# Altium PCB BMS-P00-V00.PcbDoc
Units mil, origin at the board's own origin, x right, y up, seen from the top; angles counter-clockwise.
Board outline 6000 x 4000 mil, 2 copper layers (Top Layer, Bottom Layer); 218 components, 128 nets, 564 pads, 0 vias.
Unrouted connection lines stored in the file: 387.
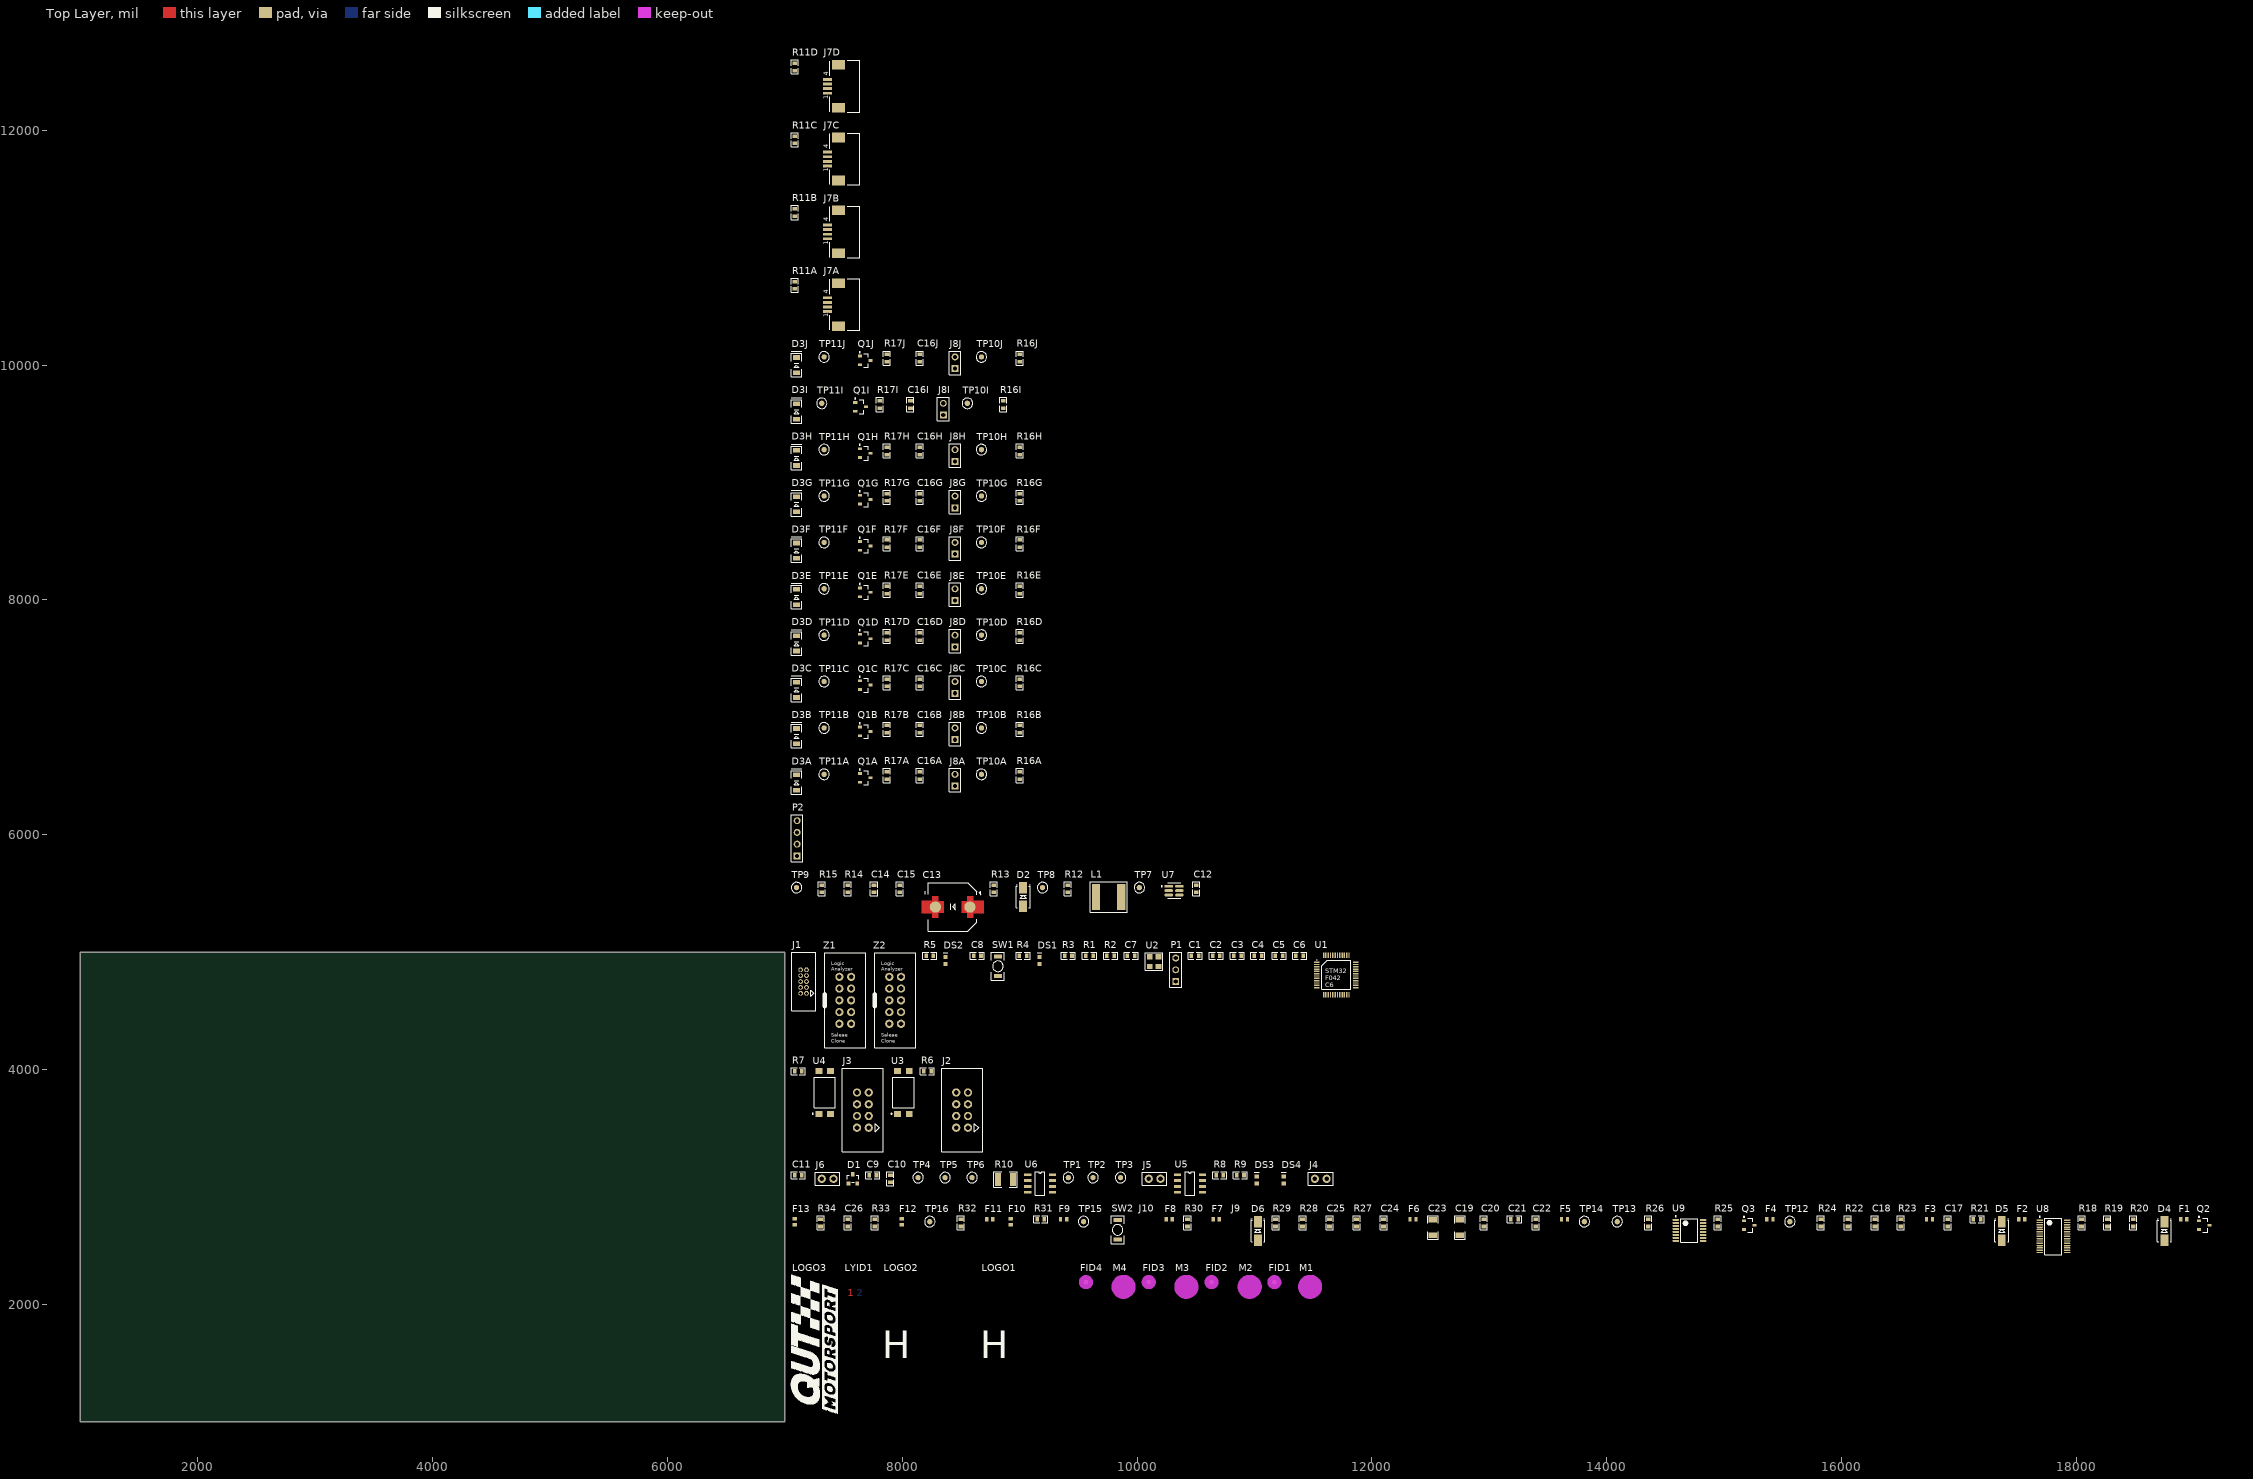
[diagram p0: Top Layer view]
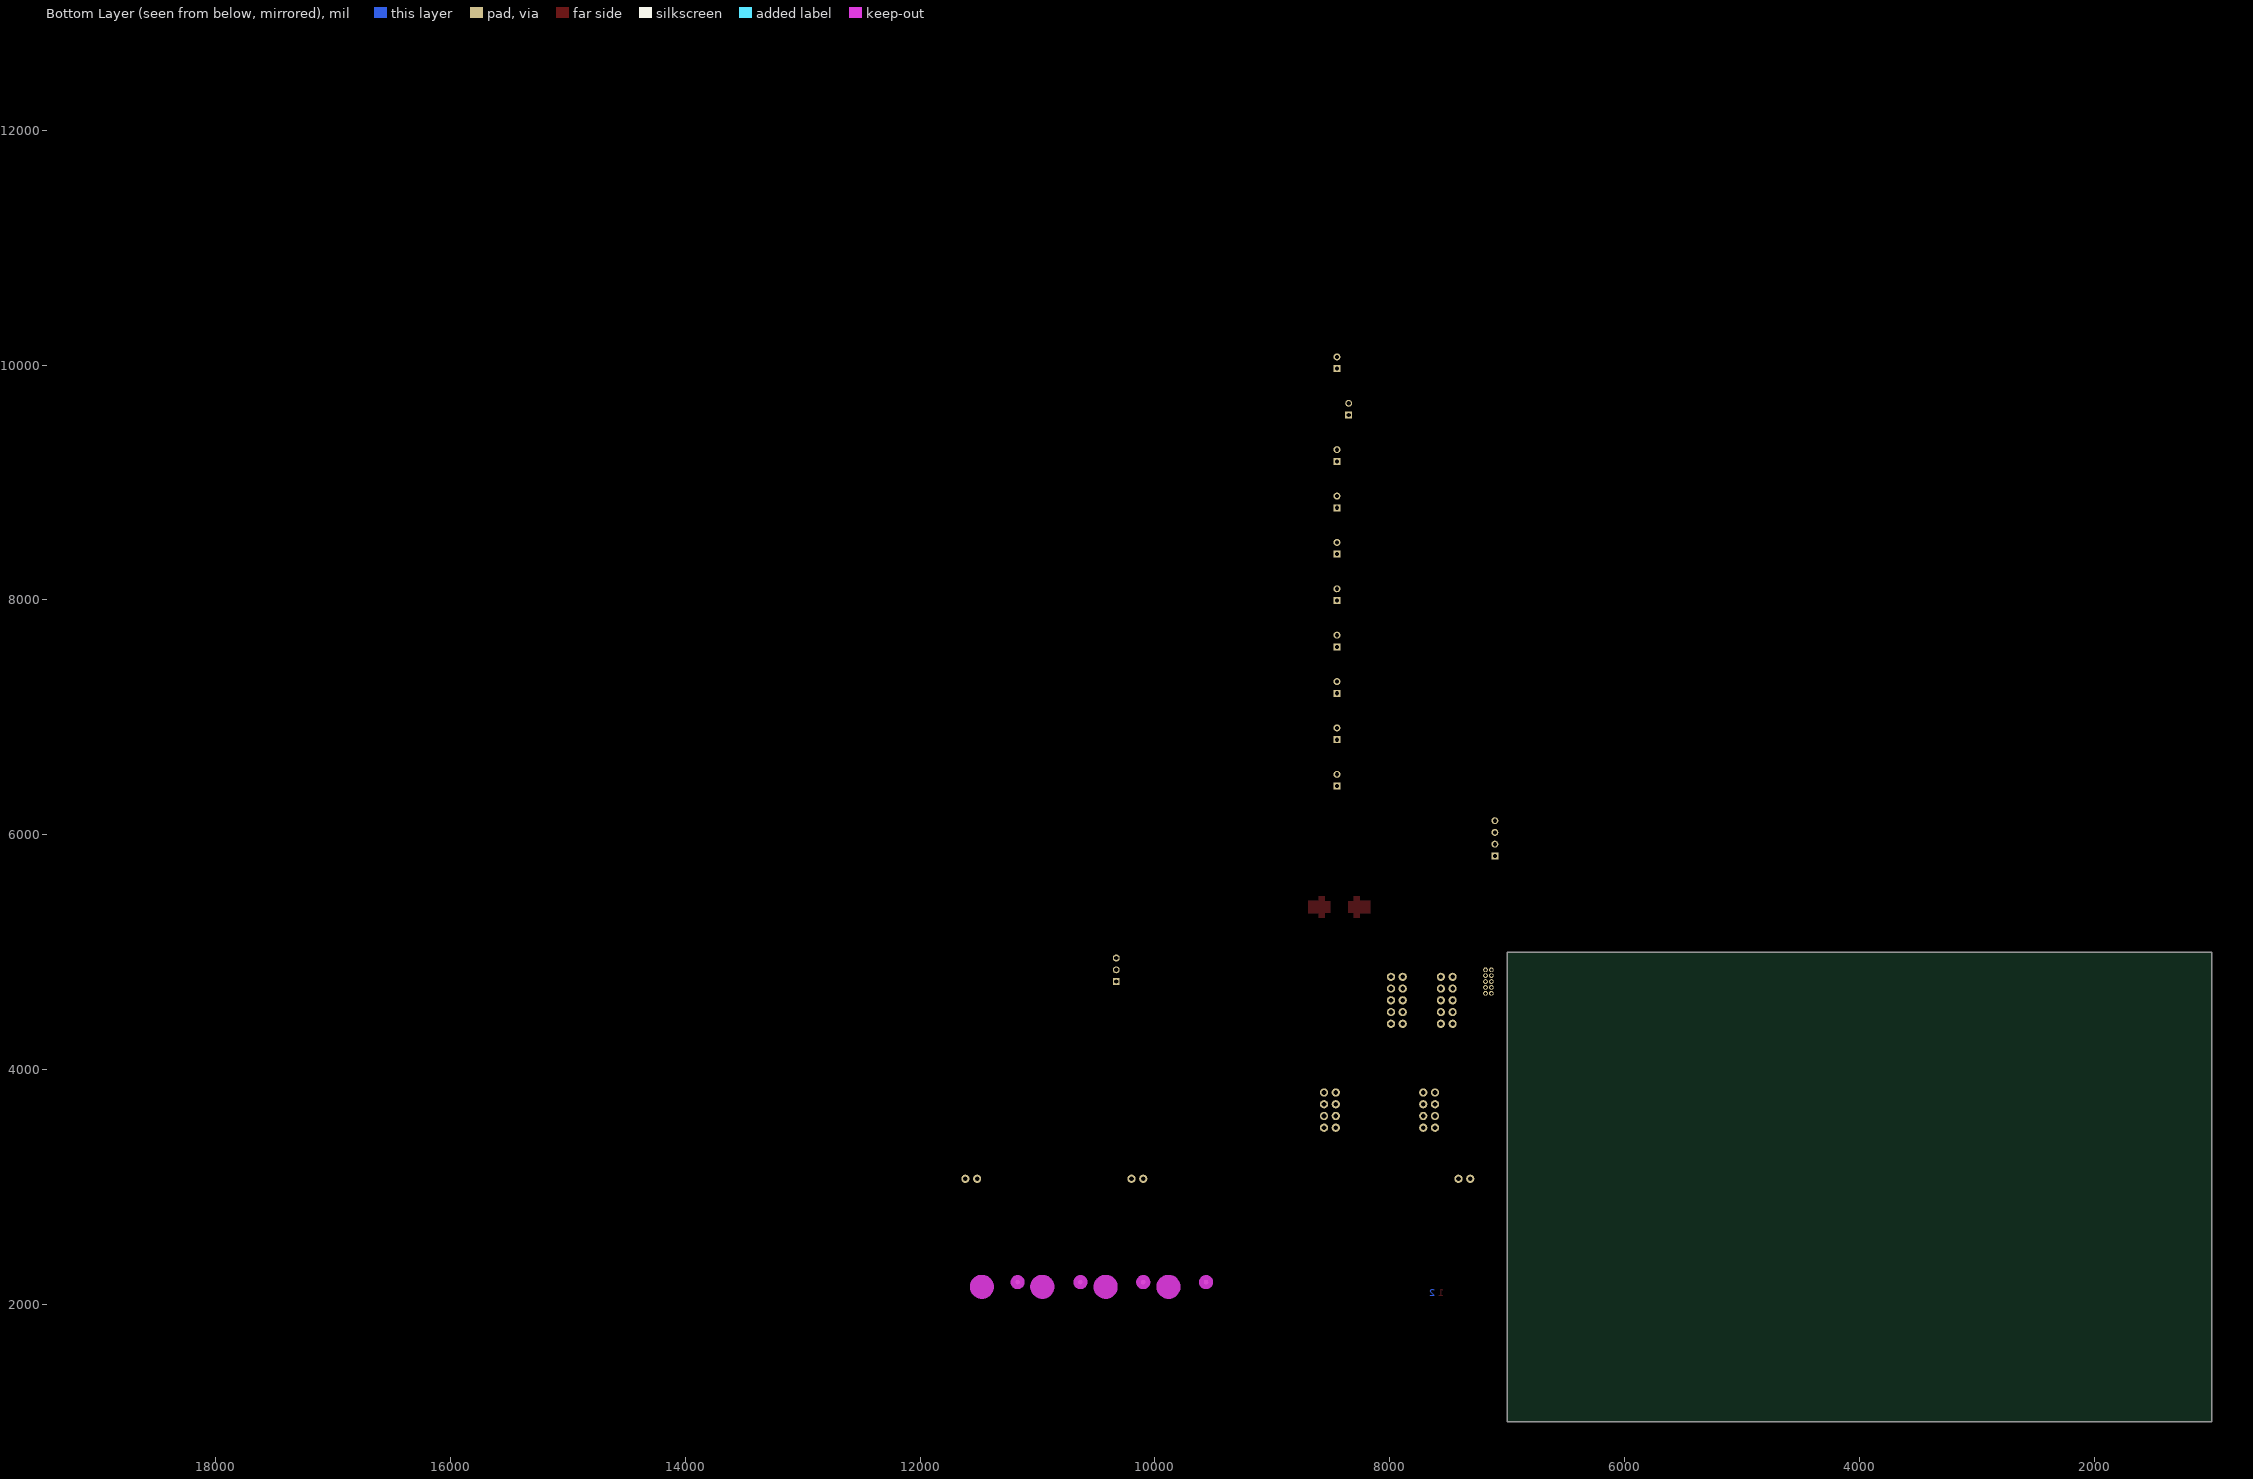
[diagram p1: Bottom Layer view, seen from below]

## Layer stack, top to bottom
Top Solder: solder mask 0.4, Solder Resist, Dk 3.5
Top Layer: signal copper 1.4
Dielectric 1: dielectric 12.6, FR-4, Dk 4.8
Bottom Layer: signal copper 1.4
Bottom Solder: solder mask 0.4, Solder Resist, Dk 3.5

## Board outline
1000,1000 7000,1000 7000,5000 1000,5000

## Design rules (kind name [scope] priority, off if disabled: settings)
Clearance [All] p1: gap=10 ignorepadtopadclearanceinfootprint=FALSE except(0: Arc-Hole Track-Hole SMDPad-Hole THPad-Hole Via-Hole Fill-Hole Poly-Hole Region-Hole Text-Hole)
PolygonConnect [All] p1: connectstyle=Relief reliefconductorwidth=10 reliefentries=4 polygonreliefangle="90 Angle" airgapwidth=10
RoomDefinition "Temperature Sensor Interface" [InComponentClass('Temperature Sensor Interface')] p1: confinementstyle=ConfineIn formatcopy=TRUE lockcomponents=FALSE outline 7045,5760 7180,5760 7180,6280 7045,6280
RoomDefinition PSU [InComponentClass('PSU')] p2: confinementstyle=ConfineIn formatcopy=TRUE lockcomponents=FALSE outline 7045,5160 10650,5160 10650,5710 7045,5710
RoomDefinition Microcontroller [InComponentClass('Microcontroller')] p3: confinementstyle=ConfineIn formatcopy=TRUE lockcomponents=FALSE outline 7045,4175 11900,4175 11900,5110 7045,5110
RoomDefinition Isolation [InComponentClass('Isolation')] p4: confinementstyle=ConfineIn formatcopy=TRUE lockcomponents=FALSE outline 7045,3290 8695,3290 8695,4125 7045,4125
RoomDefinition "Isolated CAN" [InComponentClass('Isolated CAN')] p5: confinementstyle=ConfineIn formatcopy=TRUE lockcomponents=FALSE outline 7045,2915 11680,2915 11680,3240 7045,3240
RoomDefinition FlexPCBTempSensors4 [InComponentClass('FlexPCBTempSensors4')] p6: confinementstyle=ConfineIn formatcopy=TRUE lockcomponents=FALSE outline 7045,12140 7650,12140 7650,12710 7045,12710
RoomDefinition FlexPCBTempSensors3 [InComponentClass('FlexPCBTempSensors3')] p7: confinementstyle=ConfineIn formatcopy=TRUE lockcomponents=FALSE outline 7045,11520 7650,11520 7650,12090 7045,12090
RoomDefinition FlexPCBTempSensors2 [InComponentClass('FlexPCBTempSensors2')] p8: confinementstyle=ConfineIn formatcopy=TRUE lockcomponents=FALSE outline 7045,10900 7650,10900 7650,11470 7045,11470
RoomDefinition FlexPCBTempSensors1 [InComponentClass('FlexPCBTempSensors1')] p9: confinementstyle=ConfineIn formatcopy=TRUE lockcomponents=FALSE outline 7045,10280 7650,10280 7650,10850 7045,10850
RoomDefinition "Cell Monitor" [InComponentClass('Cell Monitor')] p10: confinementstyle=ConfineIn formatcopy=TRUE lockcomponents=FALSE outline 7045,2405 19170,2405 19170,2865 7045,2865
RoomDefinition "CELL 10 INTERFACE" [InComponentClass('CELL 10 INTERFACE')] p11: confinementstyle=ConfineIn formatcopy=TRUE lockcomponents=FALSE outline 7045,9890 9205,9890 9205,10230 7045,10230
RoomDefinition "CELL 9 INTERFACE" [InComponentClass('CELL 9 INTERFACE')] p12: confinementstyle=ConfineIn formatcopy=TRUE lockcomponents=FALSE outline 7045,9495 9045,9495 9045,9835 7045,9835
RoomDefinition "CELL 8 INTERFACE" [InComponentClass('CELL 8 INTERFACE')] p13: confinementstyle=ConfineIn formatcopy=TRUE lockcomponents=FALSE outline 7045,9100 9205,9100 9205,9440 7045,9440
RoomDefinition "CELL 7 INTERFACE" [InComponentClass('CELL 7 INTERFACE')] p14: confinementstyle=ConfineIn formatcopy=TRUE lockcomponents=FALSE outline 7045,8705 9205,8705 9205,9045 7045,9045
RoomDefinition "CELL 6 INTERFACE" [InComponentClass('CELL 6 INTERFACE')] p15: confinementstyle=ConfineIn formatcopy=TRUE lockcomponents=FALSE outline 7045,8310 9205,8310 9205,8650 7045,8650
RoomDefinition "CELL 5 INTERFACE" [InComponentClass('CELL 5 INTERFACE')] p16: confinementstyle=ConfineIn formatcopy=TRUE lockcomponents=FALSE outline 7045,7915 9205,7915 9205,8255 7045,8255
RoomDefinition "CELL 4 INTERFACE" [InComponentClass('CELL 4 INTERFACE')] p17: confinementstyle=ConfineIn formatcopy=TRUE lockcomponents=FALSE outline 7045,7520 9205,7520 9205,7860 7045,7860
RoomDefinition "CELL 3 INTERFACE" [InComponentClass('CELL 3 INTERFACE')] p18: confinementstyle=ConfineIn formatcopy=TRUE lockcomponents=FALSE outline 7045,7125 9205,7125 9205,7465 7045,7465
RoomDefinition "CELL 2 INTERFACE" [InComponentClass('CELL 2 INTERFACE')] p19: confinementstyle=ConfineIn formatcopy=TRUE lockcomponents=FALSE outline 7045,6730 9205,6730 9205,7070 7045,7070
RoomDefinition "CELL 1 INTERFACE" [InComponentClass('CELL 1 INTERFACE')] p20: confinementstyle=ConfineIn formatcopy=TRUE lockcomponents=FALSE outline 7045,6335 9205,6335 9205,6675 7045,6675
RoomDefinition BMS-S01-V00-BatteryManagementSystem [InComponentClass('BMS-S01-V00-BatteryManagementSystem')] p21: confinementstyle=ConfineIn formatcopy=TRUE lockcomponents=FALSE outline 7045,1060 11585,1060 11585,2360 7045,2360
RoutingVias [All] p1: holewidth=28 width=50 viastyle="Through Hole" minholewidth=28 minwidth=50 maxholewidth=28 maxwidth=50
SolderMaskExpansion [All] p1: expansion=4 istentingtop=FALSE
Width "Schematic Width Constraint_24" [InNet('CV7')] p1: maxlimit=30 minlimit=15 preferedwidth=20 minimp=50.000000 maximp=50.000000 favimp=50.000000
Width "Schematic Width Constraint_23" [InNet('CVF3')] p2: maxlimit=30 minlimit=15 preferedwidth=20 minimp=50.000000 maximp=50.000000 favimp=50.000000
Width "Schematic Width Constraint_22" [InNet('C0')] p3: maxlimit=30 minlimit=15 preferedwidth=20 minimp=50.000000 maximp=50.000000 favimp=50.000000
Width "Schematic Width Constraint_21" [InNet('CV3')] p4: maxlimit=30 minlimit=15 preferedwidth=20 minimp=50.000000 maximp=50.000000 favimp=50.000000
Width "Schematic Width Constraint_20" [InNet('CV10')] p5: maxlimit=30 minlimit=15 preferedwidth=20 minimp=50.000000 maximp=50.000000 favimp=50.000000
Width "Schematic Width Constraint_19" [InNet('CV5')] p6: maxlimit=30 minlimit=15 preferedwidth=20 minimp=50.000000 maximp=50.000000 favimp=50.000000
Width "Schematic Width Constraint_18" [InNet('CV9')] p7: maxlimit=30 minlimit=15 preferedwidth=20 minimp=50.000000 maximp=50.000000 favimp=50.000000
Width "Schematic Width Constraint_17" [InNet('CV2')] p8: maxlimit=30 minlimit=15 preferedwidth=20 minimp=50.000000 maximp=50.000000 favimp=50.000000
Width "Schematic Width Constraint_16" [InNet('NetF1_2')] p9: maxlimit=30 minlimit=15 preferedwidth=20 minimp=50.000000 maximp=50.000000 favimp=50.000000
Width "Schematic Width Constraint_15" [InNet('CVF9')] p10: maxlimit=30 minlimit=15 preferedwidth=20 minimp=50.000000 maximp=50.000000 favimp=50.000000
Width "Schematic Width Constraint_14" [InNet('CVF5')] p11: maxlimit=30 minlimit=15 preferedwidth=20 minimp=50.000000 maximp=50.000000 favimp=50.000000
Width "Schematic Width Constraint_13" [InNet('C10')] p12: maxlimit=30 minlimit=15 preferedwidth=20 minimp=50.000000 maximp=50.000000 favimp=50.000000
Width "Schematic Width Constraint_12" [InNet('CVF0')] p13: maxlimit=30 minlimit=15 preferedwidth=20 minimp=50.000000 maximp=50.000000 favimp=50.000000
Width "Schematic Width Constraint_11" [InNet('CVF7')] p14: maxlimit=30 minlimit=15 preferedwidth=20 minimp=50.000000 maximp=50.000000 favimp=50.000000
Width "Schematic Width Constraint_10" [InNet('CV0')] p15: maxlimit=30 minlimit=15 preferedwidth=20 minimp=50.000000 maximp=50.000000 favimp=50.000000
Width "Schematic Width Constraint_9" [InNet('CV4')] p16: maxlimit=30 minlimit=15 preferedwidth=20 minimp=50.000000 maximp=50.000000 favimp=50.000000
Width "Schematic Width Constraint_8" [InNet('CVF1')] p17: maxlimit=30 minlimit=15 preferedwidth=20 minimp=50.000000 maximp=50.000000 favimp=50.000000
Width "Schematic Width Constraint_7" [InNet('CV8')] p18: maxlimit=30 minlimit=15 preferedwidth=20 minimp=50.000000 maximp=50.000000 favimp=50.000000
Width "Schematic Width Constraint_6" [InNet('CVF2')] p19: maxlimit=30 minlimit=15 preferedwidth=20 minimp=50.000000 maximp=50.000000 favimp=50.000000
Width "Schematic Width Constraint_5" [InNet('CVF6')] p20: maxlimit=30 minlimit=15 preferedwidth=20 minimp=50.000000 maximp=50.000000 favimp=50.000000
Width "Schematic Width Constraint_4" [InNet('CVF10')] p21: maxlimit=30 minlimit=15 preferedwidth=20 minimp=50.000000 maximp=50.000000 favimp=50.000000
Width "Schematic Width Constraint_3" [InNet('CVF4')] p22: maxlimit=30 minlimit=15 preferedwidth=20 minimp=50.000000 maximp=50.000000 favimp=50.000000
Width "Schematic Width Constraint_2" [InNet('CV1')] p23: maxlimit=30 minlimit=15 preferedwidth=20 minimp=50.000000 maximp=50.000000 favimp=50.000000
Width "Schematic Width Constraint_1" [InNet('CVF8')] p24: maxlimit=30 minlimit=15 preferedwidth=20 minimp=50.000000 maximp=50.000000 favimp=50.000000
Width "Schematic Width Constraint" [InNet('CV6')] p25: maxlimit=30 minlimit=15 preferedwidth=20 minimp=50.000000 maximp=50.000000 favimp=50.000000
Width [All] p26: maxlimit=10 minlimit=10 preferedwidth=10
30 further rules are at their usual default settings.

## Classes and differential pairs
channel class BMS-S09-V00-TemperatureSensors: FlexPCBTempSensors1 FlexPCBTempSensors2 FlexPCBTempSensors3 FlexPCBTempSensors4
channel class BMS-S03-V00-CellInterface: "CELL 1 INTERFACE" "CELL 2 INTERFACE" "CELL 3 INTERFACE" "CELL 4 INTERFACE" "CELL 5 INTERFACE" "CELL 6 INTERFACE" "CELL 7 INTERFACE" "CELL 8 INTERFACE" "CELL 9 INTERFACE" "CELL 10 INTERFACE"
net class TEMP[1..4]: TEMP1 TEMP2 TEMP3 TEMP4
component class "Temperature Sensor Interface": P2
component class PSU: C12 C13 C14 C15 D2 L1 R12 R13 R14 R15 TP7 TP8 TP9 U7
component class Microcontroller: C1 C2 C3 C4 C5 C6 C7 C8 DS1 DS2 J1 P1 R1 R2 R3 R4 R5 SW1 U1 U2 Z1 Z2
component class Isolation: J2 J3 R6 R7 U3 U4
component class "Isolated CAN": C9 C10 C11 D1 DS3 DS4 J4 J5 J6 R8 R9 R10 TP1 TP2 TP3 TP4 TP5 TP6 U5 U6
component class FlexPCBTempSensors4: J7D R11D
component class FlexPCBTempSensors3: J7C R11C
component class FlexPCBTempSensors2: J7B R11B
component class FlexPCBTempSensors1: J7A R11A
component class "Cell Monitor": C17 C18 C19 C20 C21 C22 C23 C24 C25 C26 D4 D5 D6 F1 F2 F3 F4 F5 F6 F7 F8 F9 F10 F11 F12 F13 J9 J10 Q2 Q3 R18 R19 R20 R21 R22 R23 R24 R25 R26 R27 R28 R29 R30 R31 R32 R33 R34 SW2 TP12 TP13 TP14 TP15 TP16 U8 U9
component class "CELL 10 INTERFACE": C16J D3J J8J Q1J R16J R17J TP10J TP11J
component class "CELL 9 INTERFACE": C16I D3I J8I Q1I R16I R17I TP10I TP11I
component class "CELL 8 INTERFACE": C16H D3H J8H Q1H R16H R17H TP10H TP11H
component class "CELL 7 INTERFACE": C16G D3G J8G Q1G R16G R17G TP10G TP11G
component class "CELL 6 INTERFACE": C16F D3F J8F Q1F R16F R17F TP10F TP11F
component class "CELL 5 INTERFACE": C16E D3E J8E Q1E R16E R17E TP10E TP11E
component class "CELL 4 INTERFACE": C16D D3D J8D Q1D R16D R17D TP10D TP11D
component class "CELL 3 INTERFACE": C16C D3C J8C Q1C R16C R17C TP10C TP11C
component class "CELL 2 INTERFACE": C16B D3B J8B Q1B R16B R17B TP10B TP11B
component class "CELL 1 INTERFACE": C16A D3A J8A Q1A R16A R17A TP10A TP11A
component class BMS-S01-V00-BatteryManagementSystem: FID1 FID2 FID3 FID4 LOGO1 LOGO2 LOGO3 LYID1 M1 M2 M3 M4

## Components (designator, comment, footprint, x,y, rotation, side; value= is the part's Value field where it differs from the comment)
C1 "100nF" Cap_Ceramic_0603 10495,4970 r0 top
C2 "4u7" Cap_Ceramic_0603 10675,4970 r0 top
C3 "100nF" Cap_Ceramic_0603 10855,4970 r0 top
C4 "4u7" Cap_Ceramic_0603 11030,4970 r0 top
C5 "100nF" Cap_Ceramic_0603 11210,4970 r0 top
C6 "4u7" Cap_Ceramic_0603 11385,4970 r0 top
C7 "100nF" Cap_Ceramic_0603 9950,4970 r0 top
C8 "100nF" Cap_Ceramic_0603 8640,4970 r0 top
C9 "100nF" Cap_Ceramic_0603 7750,3100 r0 top
C10 "100nF" Cap_Ceramic_0603 7900,3070 r90 top
C11 "100nF" Cap_Ceramic_0603 7115,3100 r0 top
C12 "100nF 100V" Cap_Ceramic_0603 10505,5540 r90 top
C13 "47uF 80V 10% AluPoly 10x10mm" CAP_ALU_10x10mm 8430,5385 r0 top
C14 "47uF 16V 1210" Cap_Ceramic_0603 7760,5540 r90 top
C15 "47uF 16V 1210" Cap_Ceramic_0603 7980,5540 r90 top
C16A "220nF" Cap_Ceramic_0603 8150,6505 r90 top (schematic designator C16)
C16B "220nF" Cap_Ceramic_0603 8150,6900 r90 top (schematic designator C16)
C16C "220nF" Cap_Ceramic_0603 8150,7295 r90 top (schematic designator C16)
C16D "220nF" Cap_Ceramic_0603 8150,7690 r90 top (schematic designator C16)
C16E "220nF" Cap_Ceramic_0603 8150,8085 r90 top (schematic designator C16)
C16F "220nF" Cap_Ceramic_0603 8150,8480 r90 top (schematic designator C16)
C16G "220nF" Cap_Ceramic_0603 8150,8875 r90 top (schematic designator C16)
C16H "220nF" Cap_Ceramic_0603 8150,9270 r90 top (schematic designator C16)
C16I "220nF" Cap_Ceramic_0603 8070,9665 r90 top (schematic designator C16)
C16J "220nF" Cap_Ceramic_0603 8150,10060 r90 top (schematic designator C16)
C17 "220nF" Cap_Ceramic_0603 16905,2695 r90 top
C18 "1uF 25V" Cap_Ceramic_0603 16285,2695 r90 top
C19 "10uF 25V 1206" Cap_Ceramic_1206 12750,2655 r90 top
C20 "220nF" Cap_Ceramic_0603 12955,2695 r90 top
C21 "1uF 25V" Cap_Ceramic_0603 13215,2725 r0 top
C22 "470nF" Cap_Ceramic_0603 13395,2695 r90 top
C23 "10uF 25V 1206" Cap_Ceramic_1206 12520,2655 r90 top
C24 "1uF 25V" Cap_Ceramic_0603 12100,2695 r90 top
C25 "220nF" Cap_Ceramic_0603 11640,2695 r90 top
C26 "220nF" Cap_Ceramic_0603 7535,2695 r90 top
D1 "NUP2105L" NUP2105L 7580,3070 r0 top
D2 "B260A-13-F" SMA 9030,5470 r90 top
D3A "BZT52C5V6-7-F" SOD123 7100,6445 r90 top (schematic designator D3)
D3B "BZT52C5V6-7-F" SOD123 7100,6840 r90 top (schematic designator D3)
D3C "BZT52C5V6-7-F" SOD123 7100,7235 r90 top (schematic designator D3)
D3D "BZT52C5V6-7-F" SOD123 7100,7630 r90 top (schematic designator D3)
D3E "BZT52C5V6-7-F" SOD123 7100,8025 r90 top (schematic designator D3)
D3F "BZT52C5V6-7-F" SOD123 7100,8420 r90 top (schematic designator D3)
D3G "BZT52C5V6-7-F" SOD123 7100,8815 r90 top (schematic designator D3)
D3H "BZT52C5V6-7-F" SOD123 7100,9210 r90 top (schematic designator D3)
D3I "BZT52C5V6-7-F" SOD123 7100,9605 r90 top (schematic designator D3)
D3J "BZT52C5V6-7-F" SOD123 7100,10000 r90 top (schematic designator D3)
D4 "1N4448WQ-7-F" SMA 18750,2625 r90 top
D5 "1N4448WQ-7-F" SMA 17365,2625 r90 top
D6 "1N4448WQ-7-F" SMA 11030,2625 r90 top
DS1 "LED Orange" "LED ORANGE 0603" 9170,4930 r90 top
DS2 "LED Orange" "LED ORANGE 0603" 8370,4930 r90 top
DS3 "LED Blue 0603" "LED BLUE 0603" 11020,3060 r90 top
DS4 "LED Blue 0603" "LED BLUE 0603" 11250,3060 r90 top
F1 "3412.0124.22" 3412.0124.22 18915,2725 r0 top
F2 "3412.0124.22" 3412.0124.22 17535,2725 r0 top
F3 "3412.0124.22" 3412.0124.22 16750,2725 r0 top
F4 "3412.0124.22" 3412.0124.22 15390,2725 r0 top
F5 "3412.0124.22" 3412.0124.22 13640,2725 r0 top
F6 "3412.0124.22" 3412.0124.22 12350,2725 r0 top
F7 "3412.0124.22" 3412.0124.22 10675,2725 r0 top
F8 "3412.0124.22" 3412.0124.22 10275,2725 r0 top
F9 "3412.0124.22" 3412.0124.22 9375,2725 r0 top
F10 "3412.0124.22" 3412.0124.22 8925,2705 r90 top
F11 "3412.0124.22" 3412.0124.22 8745,2725 r0 top
F12 "3412.0124.22" 3412.0124.22 7995,2705 r90 top
F13 "3412.0124.22" 3412.0124.22 7085,2705 r90 top
FID1 "Fiducial 1MM" "FIDUCIAL 1MM" 11170,2190 r0 top
FID2 "Fiducial 1MM" "FIDUCIAL 1MM" 10635,2190 r90 top
FID3 "Fiducial 1MM" "FIDUCIAL 1MM" 10100,2190 r90 top
FID4 "Fiducial 1MM" "FIDUCIAL 1MM" 9565,2190 r90 top
J1 "IDC 10P 2x5 1.27mm" "IDC 1.27MM 10P" 7160,4750 r90 top
J2 "IDC 8P 2x4" "IDC 2.54MM 8P" 8510,3655 r90 top
J3 "IDC 8P 2x4" "IDC 2.54MM 8P" 7665,3655 r90 top
J4 "Jumper 2Way Pins" Jumper_2Way_Pin 11615,3070 r0 top
J5 "Jumper 2Way Pins" Jumper_2Way_Pin 10200,3070 r0 top
J6 "Jumper 2Way Pins" Jumper_2Way_Pin 7415,3070 r0 top
J7A "0526100672" 522710479 7425,10515 r90 top (schematic designator J7)
J7B "0526100672" 522710479 7425,11135 r90 top (schematic designator J7)
J7C "0526100672" 522710479 7425,11755 r90 top (schematic designator J7)
J7D "0526100672" 522710479 7425,12375 r90 top (schematic designator J7)
J8A "Bleed Header" HDR1X2 8450,6415 r90 top (schematic designator J8)
J8B "Bleed Header" HDR1X2 8450,6810 r90 top (schematic designator J8)
J8C "Bleed Header" HDR1X2 8450,7205 r90 top (schematic designator J8)
J8D "Bleed Header" HDR1X2 8450,7600 r90 top (schematic designator J8)
J8E "Bleed Header" HDR1X2 8450,7995 r90 top (schematic designator J8)
J8F "Bleed Header" HDR1X2 8450,8390 r90 top (schematic designator J8)
J8G "Bleed Header" HDR1X2 8450,8785 r90 top (schematic designator J8)
J8H "Bleed Header" HDR1X2 8450,9180 r90 top (schematic designator J8)
J8I "Bleed Header" HDR1X2 8350,9575 r90 top (schematic designator J8)
J8J "Bleed Header" HDR1X2 8450,9970 r90 top (schematic designator J8)
J9 "436500519" Microfit_1X5_R_SMD 10800,2755 r90 top
J10 "436500819" Microfit_1X8_R_SMD 10010,2755 r90 top
L1 "74404064221" Inductor_6x6mm 9755,5470 r0 top
LOGO1 "LBL High Voltage M" "LBL HV MEDIUM" 9060,1860 r0 top
LOGO2 "LBL High Voltage M" "LBL HV MEDIUM" 8225,1860 r0 top
LOGO3 "30mm Wide QUTMS Logo" "QUTMS LOGO 30MM" 7450,1070 r90 top
LYID1 "2 Layer Identification PCB Marker" "LAYER IDENT 2" 7590,2100 r0 top
M1 "Hole M3 Tight Unplated" "M3.2 UNPLATED" 11475,2150 r0 top
M2 "Hole M3 Tight Unplated" "M3.2 UNPLATED" 10960,2150 r0 top
M3 "Hole M3 Tight Unplated" "M3.2 UNPLATED" 10420,2150 r0 top
M4 "Hole M3 Tight Unplated" "M3.2 UNPLATED" 9885,2150 r0 top
P1 "UART" HDR1X3 10330,4750 r90 top
P2 "Header 4" HDR1X4 7105,5820 r90 top
Q1A "MOSFET N" PMV15UNEAR 7685,6485 r0 top (schematic designator Q1)
Q1B "MOSFET N" PMV15UNEAR 7685,6880 r0 top (schematic designator Q1)
Q1C "MOSFET N" PMV15UNEAR 7685,7275 r0 top (schematic designator Q1)
Q1D "MOSFET N" PMV15UNEAR 7685,7670 r0 top (schematic designator Q1)
Q1E "MOSFET N" PMV15UNEAR 7685,8065 r0 top (schematic designator Q1)
Q1F "MOSFET N" PMV15UNEAR 7685,8460 r0 top (schematic designator Q1)
Q1G "MOSFET N" PMV15UNEAR 7685,8855 r0 top (schematic designator Q1)
Q1H "MOSFET N" PMV15UNEAR 7685,9250 r0 top (schematic designator Q1)
Q1I "MOSFET N" PMV15UNEAR 7645,9645 r0 top (schematic designator Q1)
Q1J "MOSFET N" PMV15UNEAR 7685,10040 r0 top (schematic designator Q1)
Q2 "BST82,215" BST82,215 19090,2675 r0 top
Q3 "BST82,215" BST82,215 15215,2675 r0 top
R1 "2k2" Res_ThinFilm_0603 9595,4970 r0 top
R2 "2k2" Res_ThinFilm_0603 9775,4970 r0 top
R3 "4k7" Res_ThinFilm_0603 9415,4970 r0 top
R4 "330R" Res_ThinFilm_0603 9030,4970 r0 top
R5 "330R" Res_ThinFilm_0603 8235,4970 r0 top
R6 "100R" Res_ThinFilm_0603 8215,3985 r0 top
R7 "150R" Res_ThinFilm_0603 7115,3985 r0 top
R8 "330R" Res_ThinFilm_0603 10705,3100 r0 top
R9 "330R" Res_ThinFilm_0603 10880,3100 r0 top
R10 "120R 1% 1210" Res_ThinFilm_1210 8880,3065 r0 top
R11A "0R" Res_ThinFilm_0603 7085,10680 r90 top (schematic designator R11)
R11B "0R" Res_ThinFilm_0603 7085,11300 r90 top (schematic designator R11)
R11C "0R" Res_ThinFilm_0603 7085,11920 r90 top (schematic designator R11)
R11D "0R" Res_ThinFilm_0603 7085,12540 r90 top (schematic designator R11)
R12 "10k 1%" Res_ThinFilm_0603 9410,5540 r90 top
R13 "64k9 1%" Res_ThinFilm_0603 8780,5540 r90 top
R14 "620R 1%" Res_ThinFilm_0603 7535,5540 r90 top
R15 "19k6 1%" Res_ThinFilm_0603 7315,5540 r90 top
R16A "1k" Res_ThinFilm_0603 9000,6505 r90 top (schematic designator R16)
R16B "1k" Res_ThinFilm_0603 9000,6900 r90 top (schematic designator R16)
R16C "1k" Res_ThinFilm_0603 9000,7295 r90 top (schematic designator R16)
R16D "1k" Res_ThinFilm_0603 9000,7690 r90 top (schematic designator R16)
R16E "1k" Res_ThinFilm_0603 9000,8085 r90 top (schematic designator R16)
R16F "1k" Res_ThinFilm_0603 9000,8480 r90 top (schematic designator R16)
R16G "1k" Res_ThinFilm_0603 9000,8875 r90 top (schematic designator R16)
R16H "1k" Res_ThinFilm_0603 9000,9270 r90 top (schematic designator R16)
R16I "1k" Res_ThinFilm_0603 8860,9665 r90 top (schematic designator R16)
R16J "1k" Res_ThinFilm_0603 9000,10060 r90 top (schematic designator R16)
R17A "1k" Res_ThinFilm_0603 7870,6505 r90 top (schematic designator R17)
R17B "1k" Res_ThinFilm_0603 7870,6900 r90 top (schematic designator R17)
R17C "1k" Res_ThinFilm_0603 7870,7295 r90 top (schematic designator R17)
R17D "1k" Res_ThinFilm_0603 7870,7690 r90 top (schematic designator R17)
R17E "1k" Res_ThinFilm_0603 7870,8085 r90 top (schematic designator R17)
R17F "1k" Res_ThinFilm_0603 7870,8480 r90 top (schematic designator R17)
R17G "1k" Res_ThinFilm_0603 7870,8875 r90 top (schematic designator R17)
R17H "1k" Res_ThinFilm_0603 7870,9270 r90 top (schematic designator R17)
R17I "1k" Res_ThinFilm_0603 7810,9665 r90 top (schematic designator R17)
R17J "1k" Res_ThinFilm_0603 7870,10060 r90 top (schematic designator R17)
R18 "10k" Res_ThinFilm_0603 18045,2695 r90 top
R19 "10k" Res_ThinFilm_0603 18265,2695 r90 top
R20 "10M" Res_ThinFilm_0603 18485,2695 r90 top
R21 "10k" Res_ThinFilm_0603 17155,2725 r0 top
R22 "10k" Res_ThinFilm_0603 16055,2695 r90 top
R23 "0R" Res_ThinFilm_0603 16505,2695 r90 top
R24 "10k" Res_ThinFilm_0603 15825,2695 r90 top
R25 "100R" Res_ThinFilm_0603 14945,2695 r90 top
R26 "100R" Res_ThinFilm_0603 14355,2695 r90 top
R27 "10k" Res_ThinFilm_0603 11870,2695 r90 top
R28 "1k" Res_ThinFilm_0603 11410,2695 r90 top
R29 "1k" Res_ThinFilm_0603 11180,2695 r90 top
R30 "10k" Res_ThinFilm_0603 10430,2695 r90 top
R31 "10k" Res_ThinFilm_0603 9180,2725 r0 top
R32 "1k" Res_ThinFilm_0603 8500,2695 r90 top
R33 "10k" Res_ThinFilm_0603 7765,2695 r90 top
R34 "DNF 0603" Res_ThinFilm_0603 7305,2695 r90 top
SW1 "B3U-1000P" "BTN B3U-1000P" 8815,4880 r90 top
SW2 "B3U-1000P" "BTN B3U-1000P" 9835,2635 r90 top
TP1 "TestPoint_SMD" TestPointSMD 9415,3080 r0 top
TP2 "TestPoint_SMD" TestPointSMD 9625,3080 r0 top
TP3 "TestPoint_SMD" TestPointSMD 9860,3080 r0 top
TP4 "TestPoint_SMD" TestPointSMD 8135,3080 r0 top
TP5 "TestPoint_SMD" TestPointSMD 8365,3080 r0 top
TP6 "TestPoint_SMD" TestPointSMD 8595,3080 r0 top
TP7 "TestPoint_SMD" TestPointSMD 10020,5550 r0 top
TP8 "TestPoint_SMD" TestPointSMD 9195,5550 r0 top
TP9 "TestPoint_SMD" TestPointSMD 7100,5550 r0 top
TP10A "TestPoint_SMD" TestPointSMD 8675,6515 r90 top (schematic designator TP10)
TP10B "TestPoint_SMD" TestPointSMD 8675,6910 r90 top (schematic designator TP10)
TP10C "TestPoint_SMD" TestPointSMD 8675,7305 r90 top (schematic designator TP10)
TP10D "TestPoint_SMD" TestPointSMD 8675,7700 r90 top (schematic designator TP10)
TP10E "TestPoint_SMD" TestPointSMD 8675,8095 r90 top (schematic designator TP10)
TP10F "TestPoint_SMD" TestPointSMD 8675,8490 r90 top (schematic designator TP10)
TP10G "TestPoint_SMD" TestPointSMD 8675,8885 r90 top (schematic designator TP10)
TP10H "TestPoint_SMD" TestPointSMD 8675,9280 r90 top (schematic designator TP10)
TP10I "TestPoint_SMD" TestPointSMD 8555,9675 r90 top (schematic designator TP10)
TP10J "TestPoint_SMD" TestPointSMD 8675,10070 r90 top (schematic designator TP10)
TP11A "TestPoint_SMD" TestPointSMD 7335,6515 r90 top (schematic designator TP11)
TP11B "TestPoint_SMD" TestPointSMD 7335,6910 r90 top (schematic designator TP11)
TP11C "TestPoint_SMD" TestPointSMD 7335,7305 r90 top (schematic designator TP11)
TP11D "TestPoint_SMD" TestPointSMD 7335,7700 r90 top (schematic designator TP11)
TP11E "TestPoint_SMD" TestPointSMD 7335,8095 r90 top (schematic designator TP11)
TP11F "TestPoint_SMD" TestPointSMD 7335,8490 r90 top (schematic designator TP11)
TP11G "TestPoint_SMD" TestPointSMD 7335,8885 r90 top (schematic designator TP11)
TP11H "TestPoint_SMD" TestPointSMD 7335,9280 r90 top (schematic designator TP11)
TP11I "TestPoint_SMD" TestPointSMD 7315,9675 r90 top (schematic designator TP11)
TP11J "TestPoint_SMD" TestPointSMD 7335,10070 r90 top (schematic designator TP11)
TP12 "TestPoint_SMD" TestPointSMD 15560,2705 r90 top
TP13 "TestPoint_SMD" TestPointSMD 14090,2705 r90 top
TP14 "TestPoint_SMD" TestPointSMD 13810,2705 r90 top
TP15 "TestPoint_SMD" TestPointSMD 9545,2705 r90 top
TP16 "TestPoint_SMD" TestPointSMD 8235,2705 r90 top
U1 "STM32F042C6" STM32F042C6 11530,4915 r0 top
U2 "DSC1001DI1-008.0000T" DSC1001DI1-008.0000TCT-ND 10145,4920 r0 top
U3 "FOD817ASD" FOD817ASD 8010,3805 r90 top
U4 "FOD817ASD" FOD817ASD 7340,3805 r90 top
U5 "Si8621BC-B-IS" Si8621BC-B-IS 10450,3030 r0 top
U6 "SN65HVD233" SN65HVD233DR 9175,3030 r0 top
U7 "LMR14010" LMR14010 10315,5525 r0 top
U8 "BQ76930" bq76930 17805,2580 r0 top
U9 "BQ76200" BQ76200 14705,2630 r0 top
Z1 "LogicAnalyzerBreakOut" LogicAnalyzer 7515,4590 r0 top
Z2 "LogicAnalyzerBreakOut" LogicAnalyzer 7940,4590 r0 top

## Footprints (in the part's own frame and the unit in brackets; to place one, negate y for a bottom-side part, rotate by r counter-clockwise, add the part's x,y. Pads: shape width x height; smd on the part's side, far side on the other; paste and mask are expansions set on the pad)
3412.0124.22 [mm] "5A Fuse"
  rect 0.7x0.95 smd: 1(-0.65,0) 2(0.65,0)
  body extent -0.8,-0.48 0.8,0.48, height 0.55
522710479 [mm] "Easy-On FFC/FPC Connector, 1.00mm Pitch, Slider Series, Right-Angle, Bottom Contact, 3.00mm Height, 6 Circuits, Tin-Bismuth Plating"
  rect 0.61x1.9 smd: 1(-1.5,1.55) 2(-0.5,1.55) 3(0.5,1.55) 4(1.5,1.55)
  rect 2.1x2.8 smd: NC(-4.65,-0.8) NC(4.65,-0.8)
  silkscreen extent -5.59,-5.46 5.59,1.02, body extent -5.5,-5.4 5.5,2, height 3.05
BQ76200 [mm] "TSOP, 16-Leads, Body 5.00x4.40mm, Pitch 0.65mm, IPC Medium Density"
  oval 1.4x0.45 smd: 1(-2.95,2.275) 2(-2.95,1.625) 3(-2.95,0.975) 4(-2.95,0.325) 5(-2.95,-0.325) 6(-2.95,-0.975) 7(-2.95,-1.625) 8(-2.95,-2.275) 9(2.95,-2.275) 10(2.95,-1.625) 11(2.95,-0.975) 12(2.95,-0.325) 13(2.95,0.325) 14(2.95,0.975) 15(2.95,1.625) 16(2.95,2.275)
  silkscreen extent -3.07,-2.55 1.85,3.17, body extent -3.21,-2.55 3.22,2.55, height 1.11
bq76930 [mm] "TSSOP, 30-Leads, Body 7.80x4.40mm, Pitch 0.50mm, IPC Medium Density"
  oval 1.4x0.3 smd: 1(-2.95,3.5) 2(-2.95,3) 3(-2.95,2.5) 4(-2.95,2) 5(-2.95,1.5) 6(-2.95,1) 7(-2.95,0.5) 8(-2.95,0) 9(-2.95,-0.5) 10(-2.95,-1) 11(-2.95,-1.5) 12(-2.95,-2) 13(-2.95,-2.5) 14(-2.95,-3) 15(-2.95,-3.5) 16(2.95,-3.5) 17(2.95,-3) 18(2.95,-2.5) 19(2.95,-2) 20(2.95,-1.5) 21(2.95,-1) 22(2.95,-0.5) 23(2.95,0) 24(2.95,0.5) 25(2.95,1) 26(2.95,1.5) 27(2.95,2) 28(2.95,2.5) 29(2.95,3) 30(2.95,3.5)
  silkscreen extent -3.07,-3.95 1.85,4.32, body extent -2.25,-3.95 2.25,3.95, height 1.2
BST82,215 [mm] "SOT23, 3-Leads, Body 2.90x2.30mm, Pitch 0.95mm, IPC Medium Density"
  rect 0.9x0.6 smd: D(1.15,0) G(-1.15,0.95) S(-1.15,-0.95)
  silkscreen extent -1.27,-1.5 0.7,1.92, body extent -0.7,-1.5 0.7,1.5, height 1.1
"BTN B3U-1000P" [mil] "OMRON B3U-1000P"
  rect 35x70 smd: 1(-82.68,0) 2(82.68,0)
  silkscreen extent -120,-55 120,55, body extent -79,-49 79,49, height 63
CAP_ALU_10x10mm [mil]
  round 97.08 smd paste+0 mask+0: A(147.18,-0.5) K(-147.11,-0.5)
  Top Layer region: 76.8,-49.22 76.8,49.21 124.05,49.21 124.05,92.52 175.23,92.52 175.23,55 265,55 265,-55 175.23,-55 175.23,-92.52 124.05,-92.52 124.05,-49.22
  Top Layer region: -76.74,-49.22 -76.74,49.21 -123.98,49.21 -123.98,92.52 -175.16,92.52 -175.17,55 -265,55 -265,-55 -175.17,-55 -175.16,-92.52 -123.98,-92.52 -123.98,-49.22
  silkscreen extent -235,-207 240,207, body extent -260,-217 260,217, height 10
Cap_Ceramic_0603 [mil]
  rect 30x40 smd: 1(-31.24,0) 2(31.24,0)
  silkscreen extent -60,-30 60,30, body extent -31,-16 32,16, height 33
Cap_Ceramic_1206 [mil]
  rect 47x71 smd: 1(-66.08,0) 2(66.08,0)
  silkscreen extent -100,-45 100,45, body extent -63,-31 63,32, height 53
DSC1001DI1-008.0000TCT-ND [mil]
  rect 48x43 smd: 1(-37.4,41.34) 2(37.4,41.34) 3(37.4,-41.34) 4(-37.4,-41.34)
  silkscreen extent -75,-75 75,75, body extent -49,-63 49,63, height 33
"FIDUCIAL 1MM" [mm]
  round 1 smd mask+1: 1(0,0)
  round 1 smd far side mask+1: 1(0,0)
  Keep-Out Layer circle w1.524: c0,0 r0.762
FOD817ASD [mm]
  rect 1.3x1.5 smd: 1(-4.6,1.27) 2(-4.6,-1.27) 3(4.6,-1.27) 4(4.6,1.27)
  silkscreen extent -4.72,-2.3 3.25,2.69, body extent -5.08,-2.3 5.08,2.3, height 3.85
HDR1X2 [mm] "Connector; Header; 2 Position"
  rect 1.5x1.5 hole 0.9: 1(0,0)
  round 1.5 hole 0.9: 2(2.54,0)
  silkscreen extent -1.27,-1.27 3.81,1.27
HDR1X3 [mm] "Connector; Header; 3 Position"
  rect 1.5x1.5 hole 0.9: 1(0,0)
  round 1.5 hole 0.9: 2(2.54,0) 3(5.08,0)
  silkscreen extent -1.27,-1.27 6.35,1.27
HDR1X4 [mm] "Connector; Header; 4 Position"
  rect 1.5x1.5 hole 0.9: 1(0,0)
  round 1.5 hole 0.9: 2(2.54,0) 3(5.08,0) 4(7.62,0)
  silkscreen extent -1.27,-1.27 8.89,1.27
"IDC 1.27MM 10P" [mil]
  round 40 hole 25: 1(-100,-25) 2(-100,25) 3(-50,-25) 4(-50,25) 5(0,-25) 6(0,25) 7(50,-25) 8(50,25) 9(100,-25) 10(100,25)
  silkscreen extent -250,-105 250,100, body extent -249,-104 249,100, height 214
"IDC 2.54MM 8P" [mil]
  round 70 hole 40: 1(-150,-50) 2(-150,50) 3(-50,-50) 4(-50,50) 5(50,-50) 5(150,-50) 6(50,50) 6(150,50)
  silkscreen extent -355,-175 355,175, body extent -354,-177 354,173, height 355
Inductor_6x6mm [mm]
  rect 1.8x5.7 smd: 1(-2.667,0) 2(2.794,0)
  silkscreen extent -3.94,-3.3 4.06,3.3, body extent -3,-3 3,3, height 4.56
Jumper_2Way_Pin [mil]
  round 70 hole 40: 1(-100,0) 2(0,0)
  silkscreen extent -155,-55 55,55, body extent -142,-48 42,47, height 332
"LAYER IDENT 2" [mil]
  Top Layer pour cut-out: 190,150
  Top Layer pour cut-out: -90,50 -90,-50 90,-50 90,50
  Top Layer pour cut-out: -10,30
  Top Layer pour cut-out: -20,-5
  Bottom Layer pour cut-out: -90,50 -90,-50 90,-50 90,50
"LBL HV MEDIUM" [mil]
"LED BLUE 0603" [mil]
  rect 35x35 smd: 1(-30,0) 2(30,0)
  silkscreen extent 65,-20 65,20, body extent -40,-20 40,20, height 30
"LED ORANGE 0603" [mil]
  rect 35x35 smd: 1(-30,0) 2(30,0)
  silkscreen extent 65,-20 65,20, body extent -40,-20 40,20, height 30
LMR14010 [mil]
  rect 73.01x24.1 smd paste+0 mask+0: 1(-44.73,36.75)
  rrect100% 73.01x24.1 smd paste+0 mask+0: 2(-44.73,-0.65) 3(-44.73,-38.05) 4(45.84,-38.05) 5(45.84,-0.65) 6(45.84,36.75)
  silkscreen extent -110,-68 56,66, body extent -101,-77 102,76, height 10
LogicAnalyzer [mil]
  round 70 hole 40: 1(-50,200) 2(50,200) 3(-50,100) 4(50,100) 5(-50,0) 6(50,0) 7(-50,-100) 8(50,-100) 9(-50,-200) 10(50,-200)
  silkscreen extent -175,-405 175,405, body extent -175,-404 175,404, height 359
"M3.2 UNPLATED" [mm]
  round 0 hole 3.2 unplated mask+2.6: 1(0,0)
  Keep-Out Layer circle w2.667: c0,0 r1.27
Microfit_1X5_R_SMD [mil]
Microfit_1X8_R_SMD [mil]
NUP2105L [mm]
  rect 0.8x0.9 smd: 1(-0.95,-1) 2(0.95,-1) 3(0,1)
  silkscreen extent -1.27,-0.76 1.27,0.76, body extent -1.45,-1.22 1.45,1.18, height 1
PMV15UNEAR [mm] "SOT23, 3-Leads, Body 2.90x2.30mm, Pitch 0.95mm, IPC Medium Density"
  rect 0.9x0.6 smd: D(1.15,0) G(-1.15,0.95) S(-1.15,-0.95)
  silkscreen extent -1.27,-1.5 0.7,1.92, body extent -0.7,-1.5 0.7,1.5, height 1.1
"QUTMS LOGO 30MM" [mil]
  silkscreen extent -1,1 1182,398
Res_ThinFilm_0603 [mil]
  rect 30x40 smd: 1(-31.24,0) 2(31.24,0)
  silkscreen extent -60,-30 60,30, body extent -31,-16 32,16, height 18
Res_ThinFilm_1210 [mm]
  rect 1.3x2.8 smd: 1(-1.625,0) 2(1.625,0)
  silkscreen extent -2.54,-1.65 2.54,1.65, body extent -1.6,-1.25 1.6,1.25, height 0.6
Si8621BC-B-IS [mm]
  rect 1.55x0.6 smd: 1(-2.7,1.905) 2(-2.7,0.635) 3(-2.7,-0.635) 4(-2.7,-1.905) 5(2.7,-1.905) 6(2.7,-0.635) 7(2.7,0.635) 8(2.7,1.905)
  silkscreen extent -1.04,-2.54 1.04,2.54, body extent -3.01,-2.45 3.01,2.45, height 1.63
SMA [mm]
  rect 2.5x1.7 smd: A(-2,0) K(2,0)
  silkscreen extent -2.3,-1.52 2.67,1.52, body extent -2.52,-1.46 2.52,1.46, height 2.4
SN65HVD233DR [mm]
  rect 1.55x0.6 smd: 1(-2.7,1.903) 2(-2.7,0.633) 3(-2.7,-0.637) 4(-2.7,-1.907) 5(2.7,-1.907) 6(2.7,-0.637) 7(2.7,0.633) 8(2.7,1.903)
  silkscreen extent -1.04,-2.54 1.04,2.54, body extent -3.01,-2.45 3.01,2.45, height 1.63
SOD123 [mil]
  rect 40x60 smd: A(-65,0) K(65,0)
  silkscreen extent -100,-45 118,45, body extent -74,-33 74,33, height 47
STM32F042C6 [mm]
  rect 1.2x0.3 smd: 1(0,0) 2(0,-0.5) 3(0,-1) 4(0,-1.5) 5(0,-2) 6(0,-2.5) 7(0,-3) 8(0,-3.5) 9(0,-4) 10(0,-4.5) 11(0,-5) 12(0,-5.5) 25(8.5,-5.5) 26(8.5,-5) 27(8.5,-4.5) 28(8.5,-4) 29(8.5,-3.5) 30(8.5,-3) 31(8.5,-2.5) 32(8.5,-2) 33(8.5,-1.5) 34(8.5,-1) 35(8.5,-0.5) 36(8.5,0)
  rect 0.3x1.2 smd: 13(1.5,-7) 14(2,-7) 15(2.5,-7) 16(3,-7) 17(3.5,-7) 18(4,-7) 19(4.5,-7) 20(5,-7) 21(5.5,-7) 22(6,-7) 23(6.5,-7) 24(7,-7) 37(7,1.5) 38(6.5,1.5) 39(6,1.5) 40(5.5,1.5) 41(5,1.5) 42(4.5,1.5) 43(4,1.5) 44(3.5,1.5) 45(3,1.5) 46(2.5,1.5) 47(2,1.5) 48(1.5,1.5)
  silkscreen extent -0.13,-5.86 7.36,0.51, body extent -0.27,-7.26 8.76,1.77, height 1.5
TestPointSMD [mil]
  round 45 smd: 1(0,0)
  silkscreen extent -45,-45 45,45

## Part data
C1 C3 C5 C7 C8 C9 C10 C11: library part "100nF 50V 5% X7R 0603", "Capacitor, Ceramic, SMD, 100nF, 50V, 5%, X7R, 0603"
C2 C4 C6: library part "4u7 50V 5% X7R 0603", "Capacitor, Ceramic, SMD, 4u7, 50V, 5%, X7R, 0603"
C12: library part "100nF 100V 5% X7R 0603", "Capacitor, Ceramic, SMD, 100nF, 100V, 5%, X7R, 0603"
C13: "Capacitor, AluPoly, SMD, 47uF, 80V, 10%, AluPoly, 10x10mm"
C14 C15: library part "47uF 16V 10% X7R 1210", "Capacitor, Ceramic, SMD, 47uF, 16V, 5%, X7R, 1210"
C16A C16B C16C C16D C16E C16F C16G C16H C16I C16J C17 C20 C25 C26: library part "220nF 50V 5% X7R 0603", "Capacitor, Ceramic, SMD, 220nF, 50V, 5%, X7R, 0603"
C18 C21 C24: library part "1uF 25V 5% X7R 0603", "Capacitor, Ceramic, SMD, 1uF, 25V, 5%, X7R, 0603"
C19 C23: library part "10uF 25V 10% X7R 1206", "Capacitor, Ceramic, SMD, 10uF, 25V, 10%, X7R, 1206"
C22: library part "470nF 50V 5% X7R 0603", "Capacitor, Ceramic, SMD, 470nF, 50V, 5%, X7R, 0603"
D2: "Diode, Schottky Barrier Rectifier, 60 V, 2 A, B260A-13-F"
D3A D3B D3C D3D D3E D3F D3G D3H D3I D3J: "Diode, SMD, Zender, 5.6V, 7%, 500mW, SOD-123", Manufacturer=Generic, MPN="1.8V 500mW"
D4 D5 D6: "Diode, SMD, 75V, 5%, 250mA, SOD123", Average Rectified Current=150mA, Forward Voltage=1V, Manufacturer="ON Semiconductor / Fairchild", Manufacturer Part Number=1N914BWS, Max Forward Surge Current (Ifsm)=4A, Max Operating Temperature=150°C, Max Repetitive Reverse Voltage (Vrrm)=75V, Max Reverse Leakage Current=5uA, Min Operating Temperature=-55°C, Package Quantity=1, Power Dissipation=200mW, Category="Rectifier Diodes", Contact Plating=Tin,Matte, Element Configuration=Single, Forward Current=150mA, Height=1mm, Lead Free="Lead Free", Length=1.8mm, Max Reverse Voltage (DC)=75V, Mount="Surface Mount", Number of Pins=2, Packaging="Tape and Reel", Peak Reverse Current=5uA, Radiation Hardening=No, REACH SVHC="No SVHC", Recovery Time=4ns, Reverse Recovery Time=4ns, Reverse Voltage=75V, Weight=0.0276g, Width=1.35mm
DS1 DS2: library part "LED ORANGE 0603"
DS3 DS4: library part "LED BLUE 0603"
F1 F2 F3 F4 F5 F6 F7 F8 F9 F10 F11 F12 F13: "FUSE BOARD MOUNT 5A 63VDC 0603"
J2 J3: "IDC 8P 2x5"
J4 J5 J6: library part "Jumper 2Way Side Pins", "Jumper 2Way Side Pins"
J7A J7B J7C J7D: library part 4PinMOLEX
J8A J8B J8C J8D J8E J8F J8G J8H J8I J8J: library part "Header 2", "Header, 2-Pin", LatestRevisionDate=17-Jul-2002, LatestRevisionNote="Re-released for DXP Platform.", Publisher="Altium Limited"
J9: library part Microfit_1x5
J10: library part Microfit_1x8
L1: "FIXED IND 220UH 660MA 850 MOHM", ComponentLink1Description=Digikey, ComponentLink1URL=https://www.digikey.com.au/product-detail/en/w%C3%BCrth-elektronik/74404064221/732-7261-1-ND/5353241, ComponentLink2Description="LCSC A", ComponentLink2URL=https://lcsc.com/product-detail/Power-Inductors_Sunlord-SWPA6045S221MT_C91047.html, ComponentLink3Description="LCSC B", ComponentLink3URL=https://lcsc.com/product-detail/Power-Inductors_SXN-Shun-Xiang-Nuo-Elec-SMNR6045-221MT_C467145.html
LOGO3: library part "QUTMS Logo 30mm"
LYID1: library part "Layer Identification 2"
M1 M2 M3 M4: "M3.2 Hole, No Plating"
P1: library part "Header 3", "Header, 3-Pin", LatestRevisionDate=17-Jul-2002, LatestRevisionNote="Re-released for DXP Platform.", Publisher="Altium Limited"
P2: "Header, 4-Pin", LatestRevisionDate=17-Jul-2002, LatestRevisionNote="Re-released for DXP Platform.", Publisher="Altium Limited"
Q1A Q1B Q1C Q1D Q1E Q1F Q1G Q1H Q1I Q1J: library part PMV15UNEAR, "MOSFET N-CH, 20V, SOT23", Manufacturer=Nexperia, Manufacturer Part Number=PMV15UNEAR
Q2 Q3: "MOSFET N-CH, 20V, SOT23"
R1 R2: library part "2k2 5% 0603", "Resistor, SMD, 2k2, 0.1W, 5%, 0603"
R3: library part "4k7 5% 0603", "Resistor, SMD, 4k7, 0.1W, 5%, 0603"
R4 R5 R8 R9: library part "330R 5% 0603", "Resistor, SMD, 330R, 0.1W, 5%, 0603"
R6 R25 R26: library part "100R 5%, 0603", "Resistor, SMD, 100R, 0.1W, 5%, 0603"
R7: library part "150R 5% 0603", "Resistor, SMD, 150R, 0.1W, 5%, 0603"
R10: "Resistor, SMD, 120R, 0.25W, 1%, 1210"
R11A R11B R11C R11D R23: library part "0R 5% 0603", "Resistor, SMD, 0R, 0.1W, 5%, 0603"
R12: library part "10k 1% 0603", "Resistor, SMD, 10k, 0.1W, 1%, 0603"
R13: library part "64k9 1% 0603", "Resistor, SMD, 64k9, 0.1W, 5%, 0603"
R14: library part "620R 1% 0603", "Resistor, SMD, 680R, 0.1W, 5%, 0603"
R15: library part "19k6 1% 0603", "Resistor, SMD, 19k6, 0.1W, 5%, 0603"
R16A R16B R16C R16D R16E R16F R16G R16H R16I R16J R17A R17B R17C R17D R17E R17F R17G R17H R17I R17J R28 R29 R32: library part "1k 5% 0603", "Resistor, SMD, 1k, 0.1W, 5%, 0603"
R18 R19 R21 R22 R24 R27 R30 R31 R33: library part "10k 5% 0603", "Resistor, SMD, 10k, 0.1W, 5%, 0603"
R20: library part "10M 5% 0603", "Resistor, SMD, 10M, 0.1W, 5%, 0603"
R34: "Resistor, SMD, DNF, 0.1W, 0603"
SW1 SW2: library part "BTN B3U-1000P", "Omron B3U-1000P Ultra Miniture Switch", ComponentLink1Description=LCSC, ComponentLink1URL=https://lcsc.com/product-detail/Tactile-Switches_BRIGHT-TSA063G50-250_C294565.html
U1: library part STM32042C6, "ARM® Cortex®-M0 STM32F0 Microcontroller IC 32-Bit 48MHz 32KB (32K x 8) FLASH 48-LQFP (7x7)", ComponentLink1Description=Digikey, ComponentLink1URL=https://www.digikey.com.au/product-detail/en/stmicroelectronics/STM32F042C6T6TR/497-19319-1-ND/10063344, ComponentLink2Description=Datasheet, ComponentLink2URL=https://www.st.com/resource/en/datasheet/stm32f042k6.pdf
U2: "on 8MHz XO (Standard) CMOS Oscillator 1.8 ~ 3.3V Standby (Power Down) 4-SMD, No Lead"
U3 U4: "Optoisolator 5kV Transistor 4SMD"
U8: "Battery Monitoring/Fuel Gauge Li-Ion/Li-Polymer/LiFePO4 0V to 16V 30-Pin TSSOP T/R", Case/Package=TFSOP, Manufacturer="Texas Instruments", Manufacturer Part Number=BQ7693003DBTR, Max Operating Temperature=85°C, Min Operating Temperature=-40°C, Operating Supply Voltage=25V, Output Voltage=16V, Package Quantity=2000, Supplier Part Number 1=296-39961-1-ND, Category="Battery Management", ComponentLink1Description=http://www.ti.com/lit/gpn/bq76930?src-supplier=Mouser, ComponentLink1URL=http://www.ti.com/lit/gpn/bq76930?src-supplier=Mouser, ComponentLink2Description=http://www.ti.com/lit/ds/symlink/bq76930.pdf?src-supplier=Digi-Key, ComponentLink2URL=http://www.ti.com/lit/ds/symlink/bq76930.pdf?src-supplier=Digi-Key, ComponentLink3Description=http://www.ti.com/lit/pdf/slpt038?src-supplier=Digi-Key, ComponentLink3URL=http://www.ti.com/lit/pdf/slpt038?src-supplier=Digi-Key, ComponentLink4Description=http://www.ti.com/general/docs/lit/getliterature.tsp?genericPartNumber=BQ76920&amp;&amp;fileType=pdf&src-supplier=Avnet+Asia, ComponentLink4URL=http://www.ti.com/general/docs/lit/getliterature.tsp?genericPartNumber=BQ76920&amp;&amp;fileType=pdf&src-supplier=Avnet+Asia, ComponentLink5Description=http://www.ti.com/general/docs/lit/getliterature.tsp?genericPartNumber=BQ76920&&fileType=pdf&src-supplier=Avnet, ComponentLink5URL=http://www.ti.com/general/docs/lit/getliterature.tsp?genericPartNumber=BQ76920&&fileType=pdf&src-supplier=Avnet, Contact Plating=Gold, Fault Protection="Over Current,Short Circuit,Over/Under Voltage", Interface=I2C, InternalPart=Test1234, Lead Free="Lead Free", Mount="Surface Mount", Number of Pins=30, Packaging="Tape and Reel", Pricing 1="1=4.66000, 10=4.18900, 25=3.96000, 100=3.25600, 250=2.92160, 500=2.81600, 1000=2.34080 (USD)", RoHS=Yes, Stock 1=4521, Supplier 1=Digi-Key, Weight=0.003439oz
U9: library part BQ76200PWR, "High-voltage battery pack front-end charge/discharge high-side NFET driver", Manufacturer="Texas Instruments", MPN=BQ76200PWR
Z1 Z2: library part LogicAnalyer
D1: ComponentLink1Description=Datasheet, ComponentLink1URL=https://www.onsemi.cn/PowerSolutions/document/NUP2105L-D.PDF, ComponentLink2Description=LCSC, ComponentLink2URL=https://lcsc.com/product-detail/TVS_ON-Semiconductor-NUP2105LT1G_C14486.html, ComponentLink3Description=Digikey, ComponentLink3URL=https://www.digikey.com.au/product-detail/en/on-semiconductor/SZNUP2105LT1G/SZNUP2105LT1GOSCT-ND/3487669
U5: ComponentLink1Description=Digikey, ComponentLink1URL=https://www.digikey.com.au/product-detail/en/silicon-labs/SI8621BC-B-ISR/336-4774-1-ND/8611005, ComponentLink2Description=Datasheet, ComponentLink2URL=https://www.silabs.com/documents/public/data-sheets/si861x-2x-datasheet.pdf
U6: ComponentLink1Description=LCSC, ComponentLink1URL=https://lcsc.com/product-detail/CAN-ICs_Texas-Instruments_SN65HVD233DRG4_Texas-Instruments-Texas-Instruments-SN65HVD233DRG4_C61643.html, ComponentLink2Description=Digikey, ComponentLink2URL=https://www.digikey.com.au/product-detail/en/texas-instruments/SN65HVD233DR/296-35967-1-ND/4134960, ComponentLink3Description=Datasheet, ComponentLink3URL=https://www.ti.com/lit/ds/symlink/sn65hvd233.pdf?ts=1588560888178, ComponentLink4Description="Ti Product Page", ComponentLink4URL=https://www.ti.com/product/SN65HVD233

## Nets (pads, with @x,y where several pads share a name; then routed paths per layer and width w, separated by ;. In a path a pad name is that pad's centre, name@x,y a point inside that pad or via, vN(x,y) a via of type N, cw(c..) or ccw(c..) an arc to the next point about the centre after c; other vN are vias at no path point)
3V3: C1.2 C2.2 C3.2 C4.2 C5.2 C6.2 C7.2 C10.2 C14.2 C15.2 J1.1 J4.1 J7A.1 J7B.1 J7C.1 J7D.1 L1.2 P2.1 R1.2 R2.2 R3.2 R4.2 R5.2 R6.2 R13.2 TP7.1 U1.1 U1.9 U1.24 U1.36 U1.48 U2.1 U2.4 U5.1
36V: C13.A Q2.S R12.2 R20.2 U7.5
"BMS BOOT": R31.2 SW2.1 TP15.1 U4.3 U8.6
"BMS BOOT ISO": J2.1 J3.1 R7.1
"BMS BOOT REF": R30.1 SW2.2 U4.4
"BMS nALARM IN": U3.4
"BMS nALARM OUT": U3.3
"BMS nALARM RETURN": 
C0: F13.1
C10: F1.1
"CAN H": D1.2 J2.4 J3.4 J5.1 TP1.1 U6.7
"CAN L": D1.1 J2.3 J3.3 R10.1 TP4.1 U6.6
"CAN LBK": J6.2 U6.5
"CAN LED": DS3.1 DS4.1 J4.2
"CAN RX": R9.1 TP6.1 U1.32 U5.3 Z1.4
"CAN RX LED": DS4.2 R9.2
"CAN TX": R8.1 TP3.1 U1.33 U5.2 Z1.3
"CAN TX LED": DS3.2 R8.2
"CELL ALERT": R32.2 U1.22
CF0: C1.1 C2.1 C3.1 C4.1 C5.1 C6.1 C7.1 C8.1 C10.1 C13.K C14.1 C15.1 C16A.1 C19.1 C20.1 C21.1 C23.1 C24.1 C26.1 F13.2 J1.3 J1.5 J1.9 J7A.3 J7B.3 J7C.3 J7D.3 P1.3 P2.3 R14.1 R15.1 R31.1 R34.1 SW1.1 U1.6 U1.8 U1.23 U1.35 U1.47 U2.2 U5.4 U7.2 U8.3 U8.28 U8.29 U9.4 U9.5 U9.7 U9.8 U9.9 Z1.10 Z2.10
CHG: R29.2 U1.26
"CHG EN": R29.1 U8.2
CV0: F12.1
CV1: F11.1
CV2: F10.1
CV3: F9.1
CV4: F8.1
CV5: F7.1
CV6: F6.1
CV7: F5.1
CV8: F4.1
CV9: F3.1
CV10: F2.1
CVF0: D3A.A F12.2 Q1A.S R33.1 R34.2
CVF1: D3B.A F11.2 J8A.1 Q1B.S R16A.1 R30.2 TP10A.1
CVF2: D3C.A F10.2 J8B.1 Q1C.S R16B.1 TP10B.1
CVF3: D3D.A F9.2 J8C.1 Q1D.S R16C.1 TP10C.1
CVF4: D3E.A F8.2 J8D.1 Q1E.S R16D.1 TP10D.1
CVF5: D3F.A F7.2 J8E.1 Q1F.S R16E.1 R24.2 R27.1 TP10E.1
CVF6: D3G.A F6.2 J8F.1 Q1G.S R16F.1 TP10F.1
CVF7: D3H.A F5.2 J8G.1 Q1H.S R16G.1 TP10G.1
CVF8: D3I.A F4.2 J8H.1 Q1I.S R16H.1 TP10H.1
CVF9: D3J.A F3.2 J8I.1 Q1J.S R16I.1 TP10I.1
CVF10: F2.2 J8J.1 R16J.1 TP10J.1
DSG: R28.2 U1.25
"DSG EN": R28.1 U8.1 U9.6
"DSG MOSFET": Q2.G R20.1 R23.2
"I2C1 SCL": R1.1 U1.42 U8.5 Z1.6
"I2C1 SDA": R2.1 U1.43 U8.4 Z1.5
"ISO 3V3": C9.2 C11.2 J2.5 J3.5 J6.1 U5.8 U6.3
"ISO CAN RX": TP5.1 U5.6 U6.4
"ISO CAN TX": TP2.1 U5.7 U6.1
"ISO GND": C9.1 C11.1 D1.3 J2.2 J2.6 J3.2 J3.6 U4.2 U5.5 U6.2 U6.8
LED0: DS1.2 U1.27 Z1.7
LED1: DS2.2 U1.28 Z1.8
nALARM: U1.15 U3.2
NetC16B_1: C16A.2 C16B.1 R16A.2 R17B.2 U8.26
NetC16C_1: C16B.2 C16C.1 R16B.2 R17C.2 U8.25
NetC16D_1: C16C.2 C16D.1 R16C.2 R17D.2 U8.24
NetC16E_1: C16D.2 C16E.1 R16D.2 R17E.2 U8.23
NetC16E_2: C16E.2 D6.A R16E.2 U8.22
NetC16G_1: C16F.2 C16G.1 R16F.2 R17G.2 U8.20
NetC16H_1: C16G.2 C16H.1 R16G.2 R17H.2 U8.19
NetC16I_1: C16H.2 C16I.1 R16H.2 R17I.2 U8.18
NetC16J_1: C16I.2 C16J.1 R16I.2 R17J.2 U8.17
NetC16J_2: C16J.2 D4.A R16J.2 U8.16
NetC17_2: C17.2 D4.K R18.1 U8.15
NetC18_2: C18.2 U8.11 U8.12 U8.14
NetC19_2: C19.2 TP14.1 U8.8
NetC21_2: C21.2 Q3.S TP13.1 U8.9
NetC22_1: C22.1 C23.2 R26.1 U9.2
NetC22_2: C22.2 U9.1
NetC24_2: C24.2 U8.7
NetC25_2: C25.2 R17F.2 R27.2 U8.21
NetC26_2: C26.2 R17A.2 R33.2 U8.27
NetD3A_K: D3A.K Q1A.G R17A.1 TP11A.1
NetD3B_K: D3B.K Q1B.G R17B.1 TP11B.1
NetD3C_K: D3C.K Q1C.G R17C.1 TP11C.1
NetD3D_K: D3D.K Q1D.G R17D.1 TP11D.1
NetD3E_K: D3E.K Q1E.G R17E.1 TP11E.1
NetD3F_K: D3F.K Q1F.G R17F.1 TP11F.1
NetD3G_K: D3G.K Q1G.G R17G.1 TP11G.1
NetD3H_K: D3H.K Q1H.G R17H.1 TP11H.1
NetD3I_K: D3I.K Q1I.G R17I.1 TP11I.1
NetD3J_K: D3J.K Q1J.G R17J.1 TP11J.1
NetD5_A: D5.A R19.1 R21.2
NetD5_K: D5.K Q3.D R21.1
NetDS1_1: DS1.1 R4.1
NetDS2_1: DS2.1 R5.1
NetF1_2: F1.2 Q2.D R18.2 R19.2 R26.2
NetJ5_2: J5.2 R10.2
NetJ7A_2: J7A.2 R11A.2
NetJ7B_2: J7B.2 R11B.2
NetJ7C_2: J7C.2 R11C.2
NetJ7D_2: J7D.2 R11D.2
NetJ8A_2: J8A.2 Q1A.D
NetJ8B_2: J8B.2 Q1B.D
NetJ8C_2: J8C.2 Q1C.D
NetJ8D_2: J8D.2 Q1D.D
NetJ8E_2: J8E.2 Q1E.D
NetJ8F_2: J8F.2 Q1F.D
NetJ8G_2: J8G.2 Q1G.D
NetJ8H_2: J8H.2 Q1H.D
NetJ8I_2: J8I.2 Q1I.D
NetJ8J_2: J8J.2 Q1J.D
NetQ3_G: Q3.G R25.1
NetR6_1: R6.1 U3.1
NetR7_2: R7.2 U4.1
NetR22_2: R22.2 U8.13
NetR23_1: R23.1 U9.12
NetR32_1: R32.1 TP16.1 U8.30
NRST: C8.2 J1.10 R3.1 SW1.2 U1.7
"OSC IN": U1.5 U2.3
"PWR CB": C12.1 U7.1
"PWR FB": R13.1 R15.2 TP9.1 U7.3
"PWR SHDN": R12.1 R14.2 U7.4
"PWR SW": C12.2 L1.1 TP8.1 U7.6
SWCLK: J1.4 U1.37
SWDIO: J1.2 U1.34
TEMP1: R11A.1 U1.10 Z2.1
TEMP2: R11B.1 U1.11 Z2.2
TEMP3: R11C.1 U1.12 Z2.3
TEMP4: R11D.1 U1.13 Z2.4
TEMP5: P2.2 U1.16 Z2.5
"TEMP SOC": J7A.4 J7B.4 J7C.4 J7D.4 P2.4 U1.14 Z2.6
"USART1 RX": P1.2 U1.31 Z1.2 Z2.8
"USART1 TX": P1.1 U1.30 Z1.1 Z2.7
VC5X: C16F.1 C17.1 C18.1 C20.2 C25.1 D6.K R22.1 R24.1 R25.2 TP12.1 U8.10
pads on no net: D2.A D2.K FID1.1 FID2.1 FID3.1 FID4.1 J1.6 J1.7 J1.8 J7A.NC J7B.NC J7C.NC J7D.NC M1.1 M2.1 M3.1 M4.1 U1.2 U1.3 U1.4 U1.17 U1.18 U1.19 U1.20 U1.21 U1.29 U1.38 U1.39 U1.40 U1.41 U1.44 U1.45 U1.46 U9.3 U9.10 U9.11 U9.13 U9.14 U9.15 U9.16 Z1.9 Z2.9

## Text inside footprints (layer, text, board x,y; h text height)
J7A: Top Overlay "4" at 7369,10606 h40 r90; Top Overlay "1" at 7369,10406 h40 r90
J7B: Top Overlay "4" at 7369,11226 h40 r90; Top Overlay "1" at 7369,11026 h40 r90
J7C: Top Overlay "4" at 7369,11846 h40 r90; Top Overlay "1" at 7369,11646 h40 r90
J7D: Top Overlay "4" at 7369,12466 h40 r90; Top Overlay "1" at 7369,12266 h40 r90
LOGO1: Top Overlay "H" at 8666.3,1466.3 h400
LOGO2: Top Overlay "H" at 7831.3,1466.3 h400
LYID1: Top Layer "1" at 7535,2070 h60; Bottom Layer "2" at 7615,2070 h60
U1: Top Overlay "STM32 / F042 / C6" at 11605,4699.82 h40
Z1: Top Overlay "Logic / Analyzer" at 7395,4840 h32; Top Overlay "Saleae / Clone" at 7395,4230 h32
Z2: Top Overlay "Logic / Analyzer" at 7820,4840 h32; Top Overlay "Saleae / Clone" at 7820,4230 h32